# EAGLE board tiny-psu-exp-v1.1 (EAGLE 9.6.2)
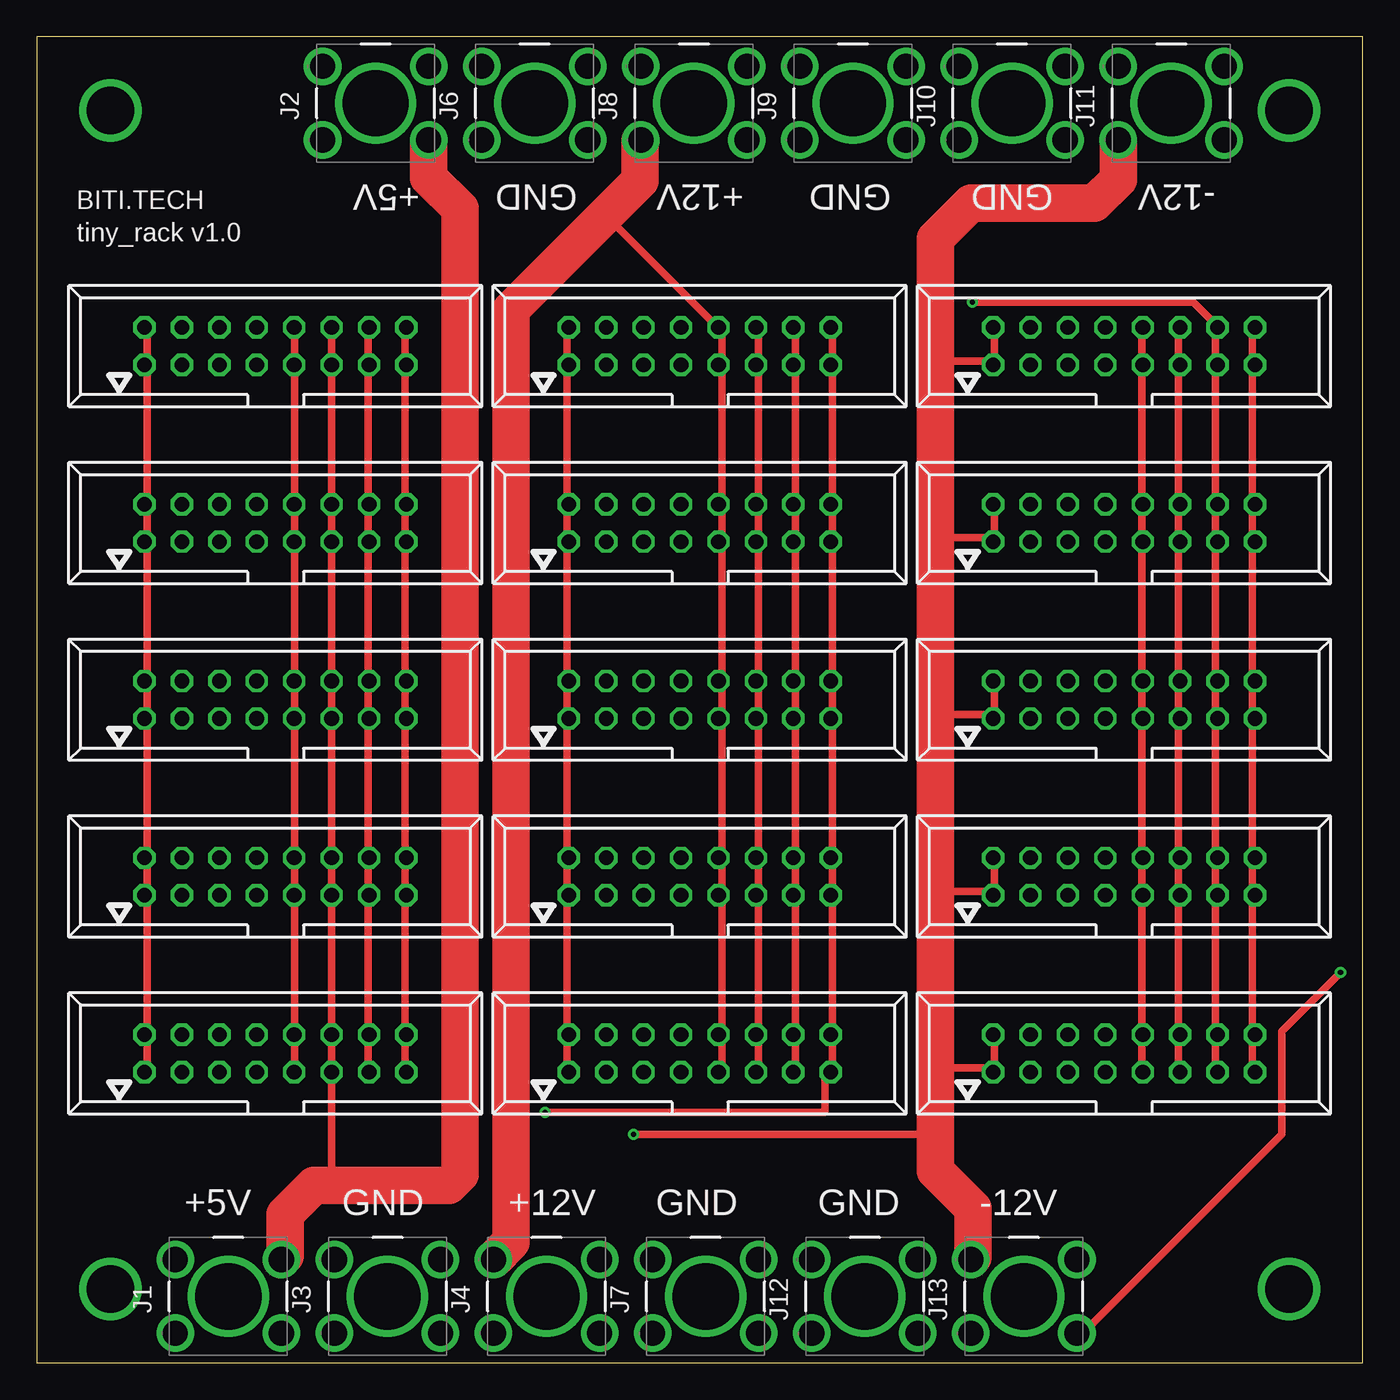
[diagram p0: board, top side]
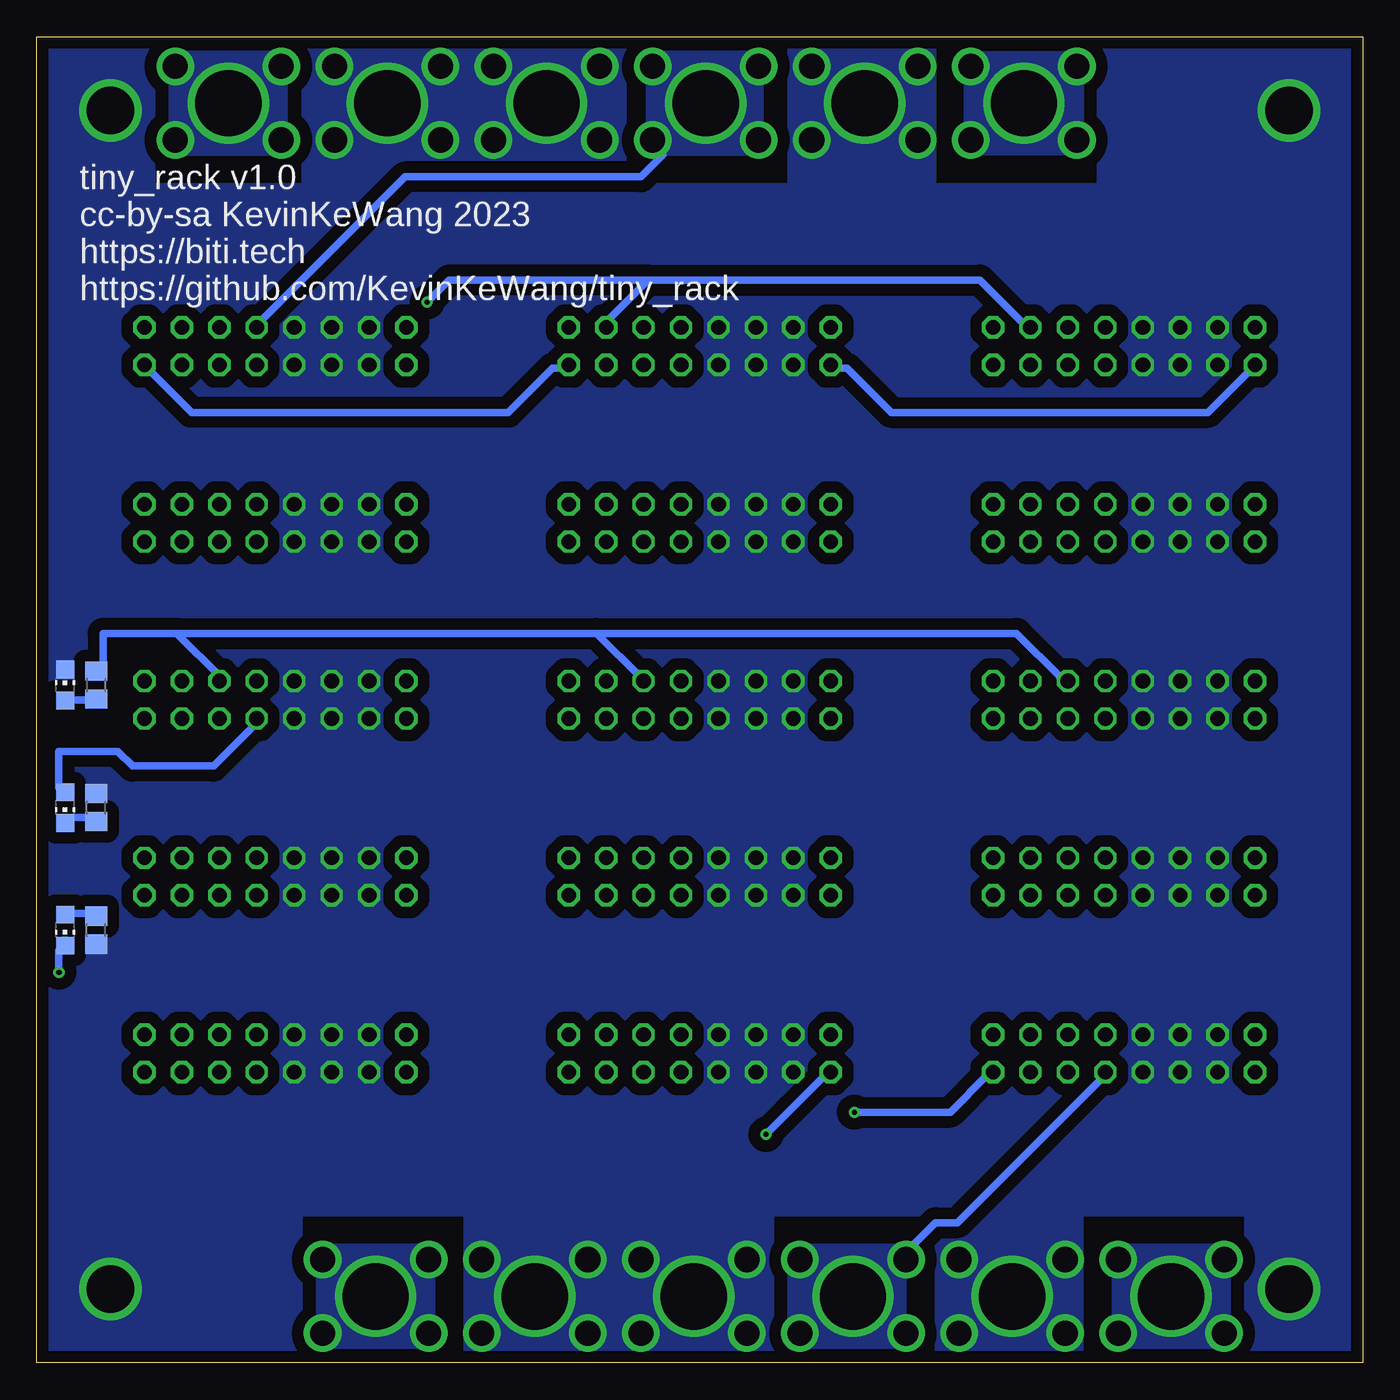
[diagram p1: board, bottom side, seen from below]

Size 90 x 90 mm. Coordinates in mm from the lower left corner, seen from the top.
Outline: 0,0 90,0 90,90 0,90 0,0
Copper layers (1+2*15+16): Top 0.035mm / dielectric 0.3mm / Route2 0.035mm / dielectric 0.75mm / Route15 0.035mm / dielectric 0.3mm / Bottom 0.035mm
Design rules "default *": minimum track width 20mil, minimum drill 0.35mm, track to track 20mil, track to pad 20mil, pad to pad 20mil, via to via 20mil, smd to smd 6mil, copper to edge 20mil, drill to drill 6mil, minimum pad ring 10mil, minimum via ring 8mil, stop-mask expansion 4mil, vias tented up to drill 0mil, thermal gap 10mil

## Footprints (pad centres in the part's own frame; a part is rotated, then mirrored left to right if it is on the bottom)
50X72 = drill 1.7: 1 -2.5,3.6; 2 2.5,3.6; 3 2.5,-3.6; 4 -2.5,-3.6 | drill 4.5: P$1 0,0
CHIP-LED0805 = smd 1.2 x 1.2: A 0,-1.05; C 0,1.05
R0805 = smd 1.3 x 1.5: 1 -0.95,0; 2 0.95,0
057-016-1 = drill 1 octagon: 1 -8.89,-1.27; 2 -8.89,1.27; 3 -6.35,-1.27; 4 -6.35,1.27; 5 -3.81,-1.27; 6 -3.81,1.27; 7 -1.27,-1.27; 8 -1.27,1.27; 9 1.27,-1.27; 10 1.27,1.27; 11 3.81,-1.27; 12 3.81,1.27; 13 6.35,-1.27; 14 6.35,1.27; 15 8.89,-1.27; 16 8.89,1.27

## Placement (x,y rotation side)
J1  30A-SCREW-CONN  [50X72]  13,4.5 90 top
J2  30A-SCREW-CONN  [50X72]  23,85.5 90 top
J3  30A-SCREW-CONN  [50X72]  23.8,4.5 90 top
J4  30A-SCREW-CONN  [50X72]  34.6,4.5 90 top
J6  30A-SCREW-CONN  [50X72]  33.8,85.5 90 top
J7  30A-SCREW-CONN  [50X72]  45.4,4.5 90 top
J8  30A-SCREW-CONN  [50X72]  44.6,85.5 90 top
J9  30A-SCREW-CONN  [50X72]  55.4,85.5 90 top
J10  30A-SCREW-CONN  [50X72]  66.2,85.5 90 top
J11  30A-SCREW-CONN  [50X72]  77,85.5 90 top
J12  30A-SCREW-CONN  [50X72]  56.2,4.5 90 top
J13  30A-SCREW-CONN  [50X72]  67,4.5 90 top
LED2  [CHIP-LED0805]  88.08,46 0 bottom
LED3  [CHIP-LED0805]  88.08,29.36 180 bottom
LED4  [CHIP-LED0805]  88.08,37.68 180 bottom
R1  2.4k  [R0805]  85.98,37.68 90 bottom
R2  2.4k  [R0805]  85.98,29.36 90 bottom
R3  1.2k  [R0805]  85.98,46 270 bottom
X1  057-016-10  [057-016-1]  45,45 0 top
X4  057-016-10  [057-016-1]  45,57 0 top
X5  057-016-10  [057-016-1]  45,69 0 top
X6  057-016-10  [057-016-1]  73.8,69 0 top
X7  057-016-10  [057-016-1]  16.2,69 0 top
X8  057-016-10  [057-016-1]  73.8,57 0 top
X9  057-016-10  [057-016-1]  73.8,45 0 top
X10  057-016-10  [057-016-1]  73.8,33 0 top
X11  057-016-10  [057-016-1]  16.2,45 0 top
X13  057-016-10  [057-016-1]  45,33 0 top
X15  057-016-10  [057-016-1]  73.8,21 0 top
X17  057-016-10  [057-016-1]  16.2,33 0 top
X18  057-016-10  [057-016-1]  45,21 0 top
X19  057-016-10  [057-016-1]  16.2,21 0 top
X20  057-016-10  [057-016-1]  16.2,57 0 top

## Library data of the parts
J1-J4 J6-J13 = conn-screw
LED2-LED4 = led
R1-R3 = rcl; SPICEPREFIX: R
X1 X4-X11 X13 X15 X17-X20 = conn-fc; OC_FARNELL: unknown; OC_NEWARK: unknown

## Nets
+5V: J1.1 J1.2 J1.3 J1.4 J1.P$1 J2.1 J2.2 J2.3 J2.4 J2.P$1 R3.1 X1.11 X1.12 X4.11 X4.12 X5.11 X5.12 X6.11 X6.12 X7.11 X7.12 X8.11 X8.12 X9.11 X9.12 X10.11 X10.12 X11.11 X11.12 X13.11 X13.12 X15.11 X15.12 X17.11 X17.12 X18.11 X18.12 X19.11 X19.12 X20.11 X20.12
+12V: J4.1 J4.2 J4.3 J4.4 J4.P$1 J8.1 J8.2 J8.3 J8.4 J8.P$1 LED4.A X1.9 X1.10 X4.9 X4.10 X5.9 X5.10 X6.9 X6.10 X7.9 X7.10 X8.9 X8.10 X9.9 X9.10 X10.9 X10.10 X11.9 X11.10 X13.9 X13.10 X15.9 X15.10 X17.9 X17.10 X18.9 X18.10 X19.9 X19.10 X20.9 X20.10
-12V: J11.1 J11.2 J11.3 J11.4 J11.P$1 J13.1 J13.2 J13.3 J13.4 J13.P$1 LED3.C X1.1 X1.2 X4.1 X4.2 X5.1 X5.2 X6.1 X6.2 X7.1 X7.2 X8.1 X8.2 X9.1 X9.2 X10.1 X10.2 X11.1 X11.2 X13.1 X13.2 X15.1 X15.2 X17.1 X17.2 X18.1 X18.2 X19.1 X19.2 X20.1 X20.2
CV1: X1.13 X1.14 X4.13 X4.14 X5.13 X5.14 X6.13 X6.14 X7.13 X7.14 X8.13 X8.14 X9.13 X9.14 X10.13 X10.14 X11.13 X11.14 X13.13 X13.14 X15.13 X15.14 X17.13 X17.14 X18.13 X18.14 X19.13 X19.14 X20.13 X20.14
GATE1: X1.15 X1.16 X4.15 X4.16 X5.15 X5.16 X6.15 X6.16 X7.15 X7.16 X8.15 X8.16 X9.15 X9.16 X10.15 X10.16 X11.15 X11.16 X13.15 X13.16 X15.15 X15.16 X17.15 X17.16 X18.15 X18.16 X19.15 X19.16 X20.15 X20.16
GND: J3.1 J3.2 J3.3 J3.4 J3.P$1 J6.1 J6.2 J6.3 J6.4 J6.P$1 J7.1 J7.2 J7.3 J7.4 J7.P$1 J9.1 J9.2 J9.3 J9.4 J9.P$1 J10.1 J10.2 J10.3 J10.4 J10.P$1 J12.1 J12.2 J12.3 J12.4 J12.P$1 LED2.C R1.2 R2.1 X1.3 X1.4 X1.5 X1.6 X1.7 X1.8 X4.3 X4.4 X4.5 X4.6 X4.7 X4.8 X5.3 X5.4 X5.5 X5.6 X5.7 X5.8 X6.3 X6.4 X6.5 X6.6 X6.7 X6.8 X7.3 X7.4 X7.5 X7.6 X7.7 X7.8 X8.3 X8.4 X8.5 X8.6 X8.7 X8.8 X9.3 X9.4 X9.5 X9.6 X9.7 X9.8 X10.3 X10.4 X10.5 X10.6 X10.7 X10.8 X11.3 X11.4 X11.5 X11.6 X11.7 X11.8 X13.3 X13.4 X13.5 X13.6 X13.7 X13.8 X15.3 X15.4 X15.5 X15.6 X15.7 X15.8 X17.3 X17.4 X17.5 X17.6 X17.7 X17.8 X18.3 X18.4 X18.5 X18.6 X18.7 X18.8 X19.3 X19.4 X19.5 X19.6 X19.7 X19.8 X20.3 X20.4 X20.5 X20.6 X20.7 X20.8
N$1: LED4.C R1.1
N$3: LED3.A R2.2
N$10: LED2.A R3.2

## Tracks (layer width: path | path; a pad name or v marks a point on that pad's centre or on a via)
+5V
  Top 0.508: X7.12 20,70 20,68 X7.11 20,67.5 20,58.5 X20.12 20,58 20,56 X20.11 20,55.5 20,46.5 X11.12 20,46 20,44 X11.11 20,43.5 20,34.5 X17.12 20,34 20,32 X17.11 20,31.5 20,22.5 X19.12 20,22 20,20 X19.11 20,19.5 20,12.05 | X5.12 49,70 49,68 X5.11 49,67.5 49,58.5 X4.12 49,58 49,56 X4.11 49,55.5 49,46.5 X1.12 49,46 49,44 X1.11 49,43.5 49,34.5 X13.12 49,34 49,32 X13.11 49,31.5 49,22.5 X18.12 49,22 49,20 X18.11 | X15.11 77.5,20 77.5,22 X15.12 77.5,22.5 77.5,31.5 X10.11 77.5,32 77.5,34 X10.12 77.5,34.5 77.5,43.5 X9.11 77.5,44 77.5,46 X9.12 77.5,46.5 77.5,55.5 X8.11 77.5,56 77.5,58 X8.12 77.5,58.5 77.5,67.5 X6.11 77.5,68 77.5,70 X6.12
  Top 2.54: J2.4 26.6,80.44 28.72,78.32 28.72,12.78 27.99,12.05 20,12.05 18.84,12.05 16.85,10.06 16.85,7.25 J1.3
  Bottom 0.508: 80.5,49.5 85.5,49.5 85.5,47 R3.1 | 80.5,49.5 77.5,46.5 X9.12 | 52,49.5 49,46.5 X1.12 | 80.5,49.5 52,49.5 | 52,49.5 23.5,49.5 20.5,46.5 X11.12
  pour Bottom (isolate 0.813, no thermals): 19,89 19,82 27,82 27,89
  pour Bottom (no thermals): 9,8 17,8 17,1 9,1
+12V
  Top 0.508: X15.9 75,20 75,22 X15.10 75,22.5 75,31.5 X10.9 75,32 75,34 X10.10 75,34.5 75,43.5 X9.9 75,44 75,46 X9.10 75,46.5 75,55.5 X8.9 75,56 75,58 X8.10 75,58.5 75,67.5 X6.9 75,68 75,70 X6.10 | X18.9 46.5,20 46.5,22 X18.10 46.5,22.5 46.5,31.5 X13.9 46.5,32 46.5,34 X13.10 46.5,34.5 46.5,43.5 X1.9 46.5,44 46.5,46 X1.10 46.5,46.5 46.5,55.5 X4.9 46.5,56 46.5,58 X4.10 46.5,58.5 46.5,67.5 X5.9 46.5,68 46.5,70 X5.10 46,70.5 38.61,77.89 | X7.10 17.5,70 17.5,68 X7.9 17.5,67.5 17.5,58.5 X20.10 17.5,58 17.5,56 X20.9 17.5,55.5 17.5,46.5 X11.10 17.5,46 17.5,44 X11.9 17.5,43.5 17.5,34.5 X17.10 17.5,34 17.5,32 X17.9 17.5,31.5 17.5,22.5 X19.10 17.5,22 17.5,20 X19.9
  Top 2.54: J8.1 40.95,82.95 40.95,80.23 38.61,77.89 32.2,71.48 32.2,8.2 J4.2
  Bottom 0.508: LED4.A 88.5,39 88.5,41.5 84.5,41.5 83.5,40.5 78,40.5 75,43.5 X9.9 | X19.9 17.5,19.5 27.5,9.5 29,9.5 30.5,8 31,8 J4.2 | X6.10 75,70.5 65,80.5 49,80.5 47.5,82 J8.4
  pour Bottom (isolate 0.813, no thermals): 40.7,89 48.6,89 48.6,82 40.7,82
  pour Bottom (no thermals): 31,8 39,8 39,1 31,1
-12V  (via drill 0.35)
  Top 0.508: X7.2 7.5,70 7.5,68 X7.1 7.5,67.5 7.5,58.5 X20.2 7.5,58 7.5,56 X20.1 7.5,55.5 7.5,46.5 X11.2 7.5,46 7.5,44 X11.1 7.5,43.5 7.5,34.5 X17.2 7.5,34 7.5,32 X17.1 7.5,31.5 7.5,22.5 X19.2 7.5,22 7.5,20 X19.1 | X5.2 36,70 36,68 X5.1 36,67.5 36,58.5 X4.2 36,58 36,56 X4.1 36,55.5 36,46.5 X1.2 36,46 36,44 X1.1 36,43.5 36,34.5 X13.2 36,34 36,32 X13.1 36,31.5 36,22.5 X18.2 36,22 36,20 X18.1 | X6.2 65,70 65,68 X6.1 64.5,68 61,68 | X8.2 65,58 65,56 X8.1 64.5,56 61,56 | X9.2 65,46 65,44 X9.1 64.5,44 61,44 | X10.2 65,34 65,32 X10.1 64.5,32 61,32 | X15.2 65,22 65,20 X15.1 64.5,20 61,20 | v88.5,26.5 84.5,22.5 84.5,15.5 71,2 J13.4 | 61,15.5 v40.5,15.5
  Top 2.54: J11.1 73.4,80.3 71.8,78.7 63.4,78.7 61,76.3 61,68 61,56 61,44 61,32 61,20 61,15.5 61,13.02 63.55,10.46 63.55,7.15 J13.2
  Bottom 0.508: X7.1 7.5,67.5 10.5,64.5 32,64.5 35,67.5 36,67.5 X5.1 | v88.5,26.5 88.5,28 LED3.C | v40.5,15.5 36.5,19.5 X18.1
  pour Bottom (isolate 0.813, no thermals): 73,89 81,89 81,82 73,82
  pour Bottom (no thermals): 63,8 71,8 71,1 63,1
CV1  (via drill 0.35)
  Top 0.508: X15.13 80,20 80,22 X15.14 80,22.5 80,31.5 X10.13 80,32 80,34 X10.14 80,34.5 80,43.5 X9.13 80,44 80,46 X9.14 80,46.5 80,55.5 X8.13 80,56 80,58 X8.14 80,58.5 80,67.5 X6.13 80,68 80,70 X6.14 80,70.5 78.5,72 v63.5,72 | X7.14 22.5,70 22.5,68 X7.13 22.5,67.5 22.5,58.5 X20.14 22.5,58 22.5,56 X20.13 22.5,55.5 22.5,46.5 X11.14 22.5,46 22.5,44 X11.13 22.5,43.5 22.5,34.5 X17.14 22.5,34 22.5,32 X17.13 22.5,31.5 22.5,22.5 X19.14 22.5,22 22.5,20 X19.13 | X5.14 51.5,70 51.5,68 X5.13 51.5,67.5 51.5,58.5 X4.14 51.5,58 51.5,56 X4.13 51.5,55.5 51.5,46.5 X1.14 51.5,46 51.5,44 X1.13 51.5,43.5 51.5,34.5 X13.14 51.5,34 51.5,32 X13.13 51.5,31.5 51.5,22.5 X18.14 51.5,22 51.5,20 X18.13
  Bottom 0.508: 48.5,73.5 26,73.5 23,70.5 X7.14 | 48.5,73.5 51.5,70.5 X5.14 | v63.5,72 62,73.5 48.5,73.5
GATE1  (via drill 0.35)
  Top 0.508: X6.16 82.5,70 82.5,68 X6.15 82.5,67.5 82.5,58.5 X8.16 82.5,58 82.5,56 X8.15 82.5,55.5 82.5,46.5 X9.16 82.5,46 82.5,44 X9.15 82.5,43.5 82.5,34.5 X10.16 82.5,34 82.5,32 X10.15 82.5,31.5 82.5,22.5 X15.16 82.5,22 82.5,20 X15.15 | X7.16 25,70 25,68 X7.15 25,67.5 25,58.5 X20.16 25,58 25,56 X20.15 25,55.5 25,46.5 X11.16 25,46 25,44 X11.15 25,43.5 25,34.5 X17.16 25,34 25,32 X17.15 25,31.5 25,22.5 X19.16 25,22 25,20 X19.15 | X5.16 54,70 54,68 X5.15 54,67.5 54,58.5 X4.16 54,58 54,56 X4.15 54,55.5 54,46.5 X1.16 54,46 54,44 X1.15 54,43.5 54,34.5 X13.16 54,34 54,32 X13.15 54,31.5 54,22.5 X18.16 54,22 54,20 X18.15 53.5,19.5 53.5,17 v34.5,17
  Bottom 0.508: v34.5,17 28,17 25.5,19.5 X19.15 | X6.15 82.5,67.5 79.5,64.5 58,64.5 55,67.5 54,67.5 X5.15
GND  (via drill 3.2)
  other vias: 5,5 85,5 85,85 5,85
  pour Bottom (isolate 0.8, no thermals): 0,90 18,90 18,80 29,80 29,90 39,90 39,80 50,80 50,90 72,90 72,80 82,80 82,90 90,90 90,0 72,0 72,10 61,10 61,0 40,0 40,10 29,10 29,0 19,0 19,10 8,10 8,0 0,0
N$1
  Bottom 0.508: LED4.C 88,37 86,37 R1.1
N$3
  Bottom 0.508: LED3.A 88,30.5 86,30.5 R2.2
N$10
  Bottom 0.508: LED2.A 88,45 86,45 R3.2

## Text on the board
tNames: +5V | GND | +12V | GND | GND | -12V | BITI.TECH | tiny_rack v1.0 | +5V | GND | +12V | GND | GND | -12V
bNames: tiny_rack v1.0 / cc-by-sa KevinKeWang 2023 / https://biti.tech / https://github.com/KevinKeWang/tiny_rack